# EAGLE board Phineas (EAGLE 9.6.2)
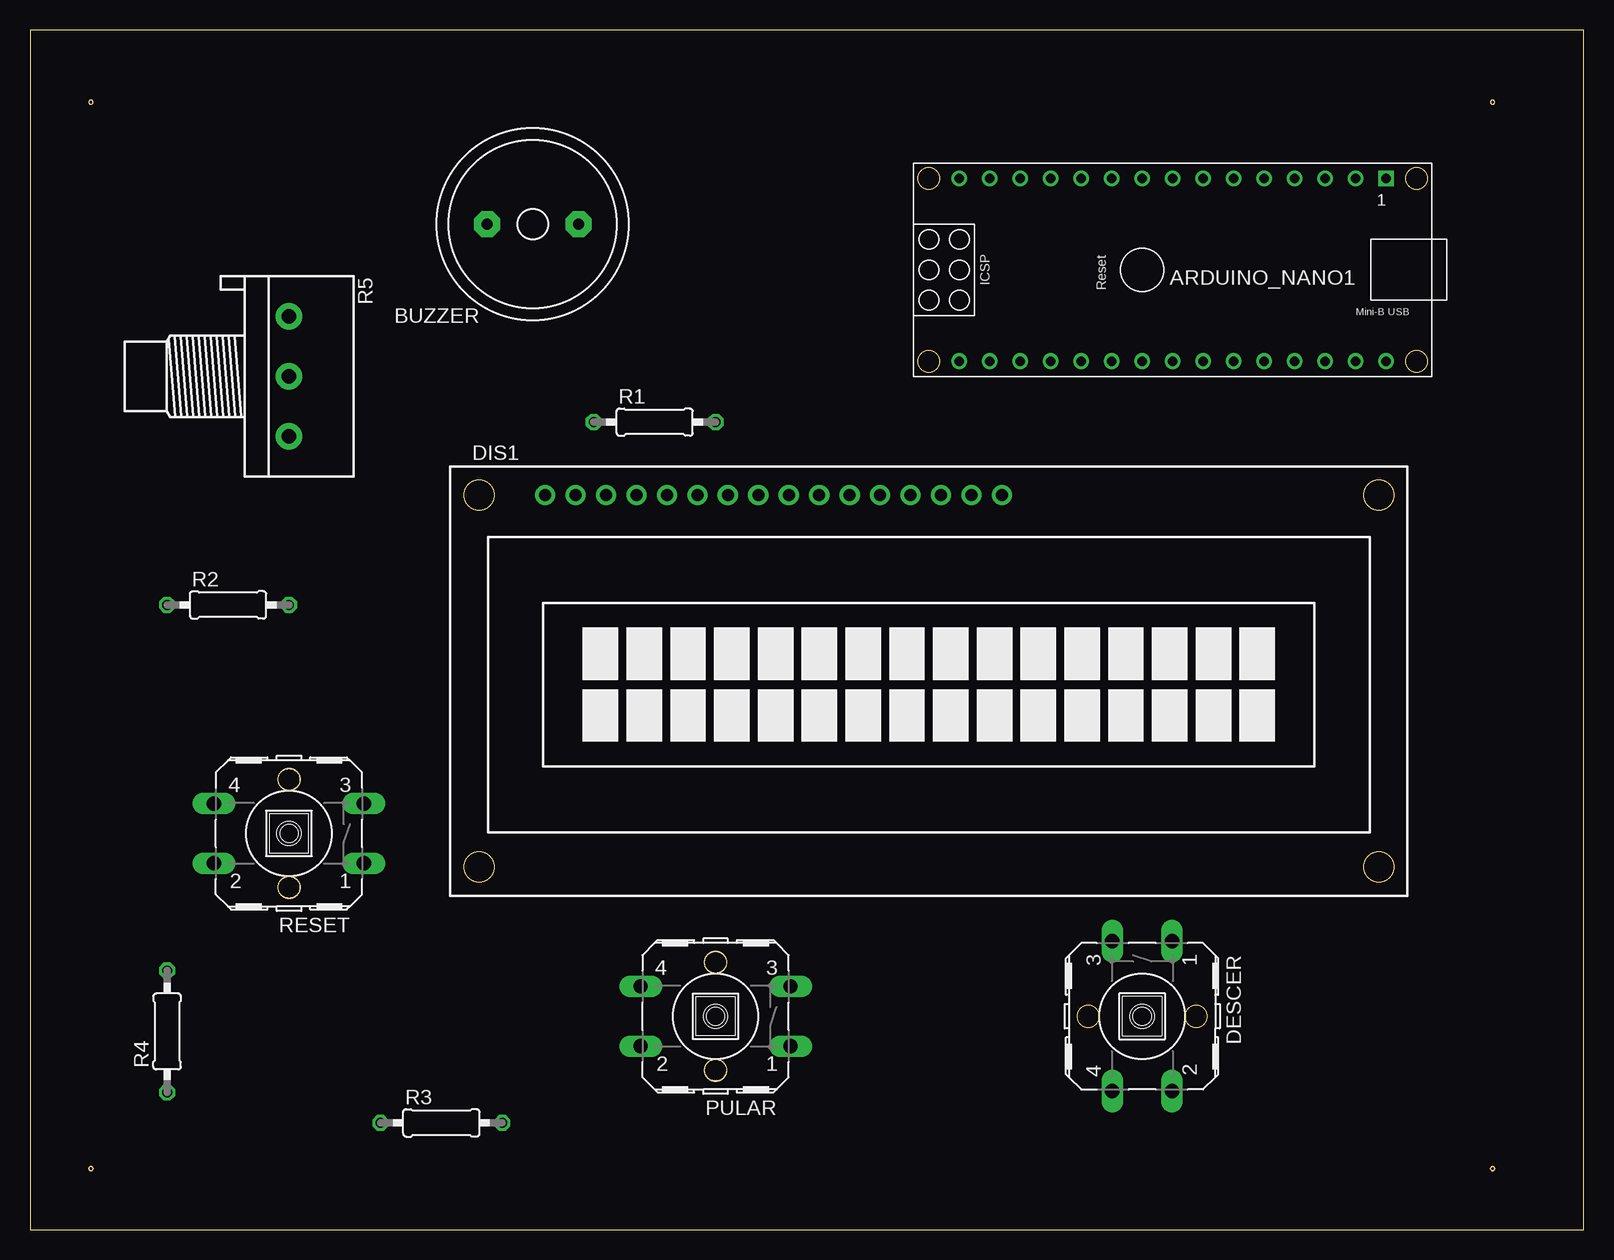
[diagram p0: board, top side]
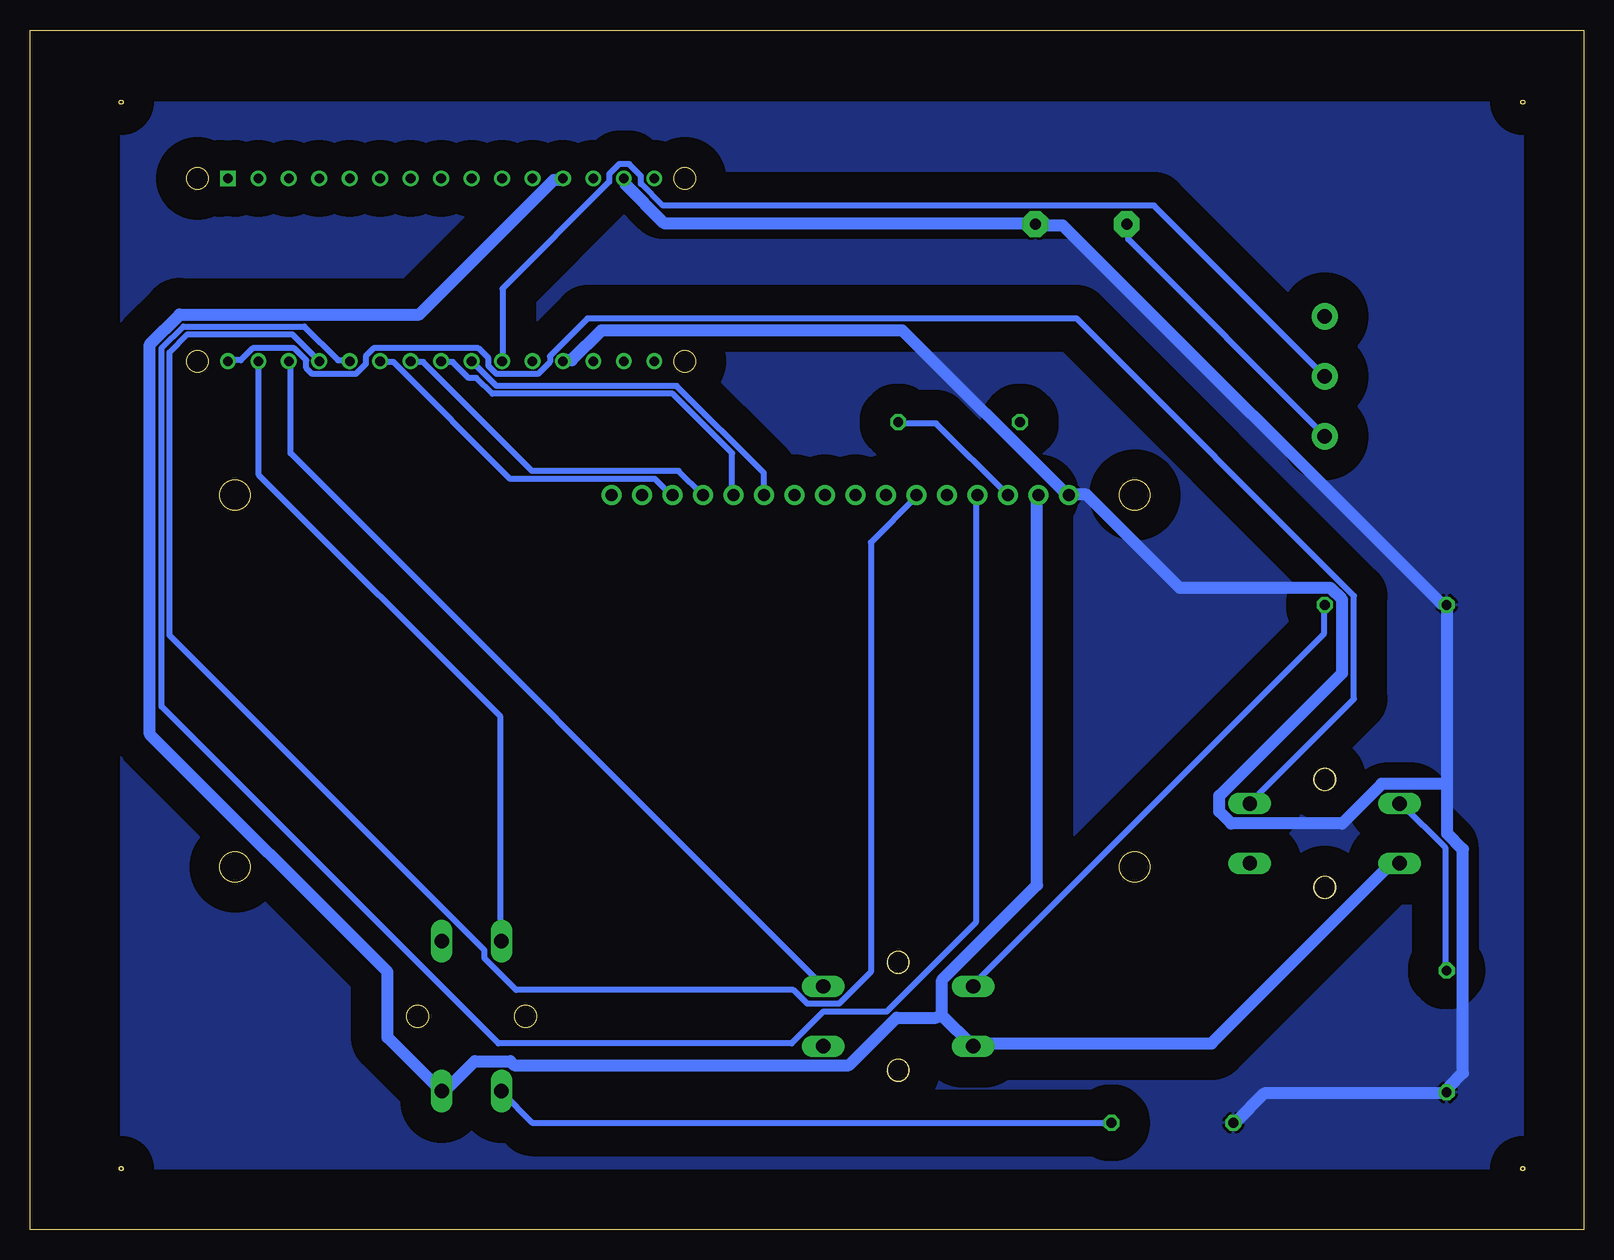
[diagram p1: board, bottom side, seen from below]

Size 129.52 x 100 mm. Coordinates in mm from the lower left corner, seen from the top.
Outline: 20.7,28.41 20.69,28.48 20.69,28.56 20.7,28.64 20.71,28.72 20.73,28.8 20.76,28.87 20.79,28.94 20.83,29.01 20.87,29.07 20.93,29.13 20.98,29.19 21.04,29.24 21.11,29.29 21.17,29.32 21.25,29.36 21.32,29.39 21.39,29.41 21.47,29.42 21.55,29.43 21.63,29.43 21.71,29.42 21.79,29.41 21.86,29.39 21.93,29.36 22.01,29.32 22.07,29.29 22.14,29.24 22.2,29.19 22.25,29.13 22.31,29.07 22.35,29.01 22.39,28.94 22.42,28.87 22.45,28.8 22.47,28.72 22.48,28.64 22.49,28.56 22.49,28.48 22.48,28.41 22.47,28.33 22.45,28.25 22.42,28.18 22.39,28.11 22.35,28.04 22.31,27.98 22.25,27.91 22.2,27.86 22.14,27.81 22.07,27.76 22.01,27.72 21.93,27.69 21.86,27.66 21.79,27.64 21.71,27.63 21.63,27.62 21.55,27.62 21.47,27.63 21.39,27.64 21.32,27.66 21.25,27.69 21.17,27.72 21.11,27.76 21.04,27.81 20.98,27.86 20.93,27.91 20.87,27.98 20.83,28.04 20.79,28.11 20.76,28.18 20.73,28.25 20.71,28.33 20.7,28.41
Outline: 20.7,37.4 20.69,37.48 20.69,37.55 20.7,37.63 20.71,37.71 20.73,37.79 20.76,37.86 20.79,37.93 20.83,38 20.87,38.06 20.93,38.13 20.98,38.18 21.04,38.23 21.11,38.28 21.17,38.32 21.25,38.35 21.32,38.38 21.39,38.4 21.47,38.41 21.55,38.42 21.63,38.42 21.71,38.41 21.79,38.4 21.86,38.38 21.93,38.35 22.01,38.32 22.07,38.28 22.14,38.23 22.2,38.18 22.25,38.13 22.31,38.06 22.35,38 22.39,37.93 22.42,37.86 22.45,37.79 22.47,37.71 22.48,37.63 22.49,37.55 22.49,37.48 22.48,37.4 22.47,37.32 22.45,37.24 22.42,37.17 22.39,37.1 22.35,37.03 22.31,36.97 22.25,36.91 22.2,36.85 22.14,36.8 22.07,36.76 22.01,36.72 21.93,36.68 21.86,36.66 21.79,36.63 21.71,36.62 21.63,36.61 21.55,36.61 21.47,36.62 21.39,36.63 21.32,36.66 21.25,36.68 21.17,36.72 21.11,36.76 21.04,36.8 20.98,36.85 20.93,36.91 20.87,36.97 20.83,37.03 20.79,37.1 20.76,37.17 20.73,37.24 20.71,37.32 20.7,37.4
Outline: 56.26,13.17 56.25,13.24 56.25,13.32 56.26,13.4 56.27,13.48 56.29,13.56 56.32,13.63 56.35,13.7 56.39,13.77 56.43,13.83 56.48,13.89 56.54,13.95 56.6,14 56.66,14.04 56.73,14.09 56.8,14.12 56.88,14.14 56.95,14.16 57.03,14.18 57.11,14.19 57.19,14.19 57.27,14.18 57.34,14.16 57.42,14.14 57.49,14.12 57.57,14.09 57.63,14.04 57.7,14 57.76,13.95 57.81,13.89 57.87,13.83 57.91,13.77 57.95,13.7 57.98,13.63 58.01,13.56 58.03,13.48 58.05,13.4 58.05,13.32 58.05,13.24 58.05,13.17 58.03,13.09 58.01,13.01 57.98,12.94 57.95,12.87 57.91,12.8 57.87,12.73 57.81,12.67 57.76,12.62 57.7,12.57 57.63,12.52 57.57,12.48 57.49,12.45 57.42,12.42 57.34,12.4 57.27,12.39 57.19,12.38 57.11,12.38 57.03,12.39 56.95,12.4 56.88,12.42 56.8,12.45 56.73,12.48 56.66,12.52 56.6,12.57 56.54,12.62 56.48,12.67 56.43,12.73 56.39,12.8 56.35,12.87 56.32,12.94 56.29,13.01 56.27,13.09 56.26,13.17
Outline: 56.26,22.16 56.25,22.24 56.25,22.32 56.26,22.39 56.27,22.47 56.29,22.55 56.32,22.62 56.35,22.69 56.39,22.76 56.43,22.82 56.48,22.89 56.54,22.94 56.6,22.99 56.66,23.04 56.73,23.08 56.8,23.11 56.88,23.14 56.95,23.16 57.03,23.17 57.11,23.18 57.19,23.18 57.27,23.17 57.34,23.16 57.42,23.14 57.49,23.11 57.57,23.08 57.63,23.04 57.7,22.99 57.76,22.94 57.81,22.89 57.87,22.82 57.91,22.76 57.95,22.69 57.98,22.62 58.01,22.55 58.03,22.47 58.05,22.39 58.05,22.32 58.05,22.24 58.05,22.16 58.03,22.08 58.01,22 57.98,21.93 57.95,21.86 57.91,21.79 57.87,21.73 57.81,21.67 57.76,21.61 57.7,21.56 57.63,21.52 57.57,21.48 57.49,21.44 57.42,21.41 57.34,21.39 57.27,21.38 57.19,21.37 57.11,21.37 57.03,21.38 56.95,21.39 56.88,21.41 56.8,21.44 56.73,21.48 56.66,21.52 56.6,21.56 56.54,21.61 56.48,21.67 56.43,21.73 56.39,21.79 56.35,21.86 56.32,21.93 56.29,22 56.27,22.08 56.26,22.16
Outline: 121.75,5.06 arc169 122.09,5.06 122.09,5.1 arc169 121.75,5.1 121.75,5.06
Outline: 121.75,93.96 arc169 122.09,93.96 122.09,94 arc169 121.75,94 121.75,93.96
Outline: 4.91,5.06 arc169 5.25,5.06 5.25,5.1 arc169 4.91,5.1 4.91,5.06
Outline: 4.91,93.96 arc169 5.25,93.96 5.25,94 arc169 4.91,94 4.91,93.96
Outline: 0,100 0,0 129.52,0 129.52,100 0,100
Outline: circle at 112.43,61.22 radius 1.25
Outline: circle at 37.43,61.22 radius 1.25
Outline: circle at 37.43,30.22 radius 1.25
Outline: circle at 112.43,30.22 radius 1.25
Outline: circle at 97.21,17.78 radius 0.9
Outline: circle at 88.21,17.78 radius 0.9
Outline: circle at 74.93,87.63 radius 0.89
Outline: circle at 74.93,72.39 radius 0.89
Outline: circle at 115.57,72.39 radius 0.89
Outline: circle at 115.57,87.63 radius 0.89
Copper layers (1*16): Top 0.035mm / dielectric 1.5mm / Bottom 0.035mm
Design rules "default": minimum track width 6mil, minimum drill 0.35mm, track to track 6mil, track to pad 6mil, pad to pad 6mil, via to via 6mil, smd to smd 6mil, copper to edge 40mil, drill to drill 6mil, minimum pad ring 10mil, minimum via ring 8mil, stop-mask expansion 4mil, vias tented up to drill 0mil, thermal gap 10mil
Net classes: 0 default: width 0.508 mm; 1 alimentacao: width 1.016 mm

## Footprints (pad centres in the part's own frame; a part is rotated, then mirrored left to right if it is on the bottom)
ARDUINO_NANO = drill 0.8 square: 1 -20.32,-7.62 | drill 0.8: 2 -17.78,-7.62; 3 -15.24,-7.62; 4 -12.7,-7.62; 5 -10.16,-7.62; 6 -7.62,-7.62; 7 -5.08,-7.62; 8 -2.54,-7.62; 9 0,-7.62; 10 2.54,-7.62; 11 5.08,-7.62; 12 7.62,-7.62; 13 10.16,-7.62; 14 12.7,-7.62; 15 15.24,-7.62; 16 15.24,7.62; 17 12.7,7.62; 18 10.16,7.62; 19 7.62,7.62; 20 5.08,7.62; 21 2.54,7.62; 22 0,7.62; 23 -2.54,7.62; 24 -5.08,7.62; 25 -7.62,7.62; 26 -10.16,7.62; 27 -12.7,7.62; 28 -15.24,7.62; 29 -17.78,7.62; 30 -20.32,7.62 | hole 1.778: -22.86,-7.62; -22.86,7.62; 17.78,7.62; 17.78,-7.62
F/QMB = drill 0.914 pad 2.159 octagon: + 3.81,0; - -3.81,0
B3F-40XX = drill 1.194 long: 1 -6.248,2.489; 2 6.248,2.489; 3 -6.248,-2.489; 4 6.248,-2.489 | hole 1.803: 0,-4.496; 0,4.496
TUXGR_16X2_R2 = drill 1 pad 1.676: 1 -32,15.5; 2 -29.46,15.5; 3 -26.92,15.5; 4 -24.38,15.5; 5 -21.84,15.5; 6 -19.3,15.5; 7 -16.76,15.5; 8 -14.22,15.5; 9 -11.68,15.5; 10 -9.14,15.5; 11 -6.6,15.5; 12 -4.06,15.5; 13 -1.52,15.5; 14 1.02,15.5; 15 3.56,15.5; 16 6.1,15.5 | hole 2.5: -37.5,-15.5; 37.5,-15.5; -37.5,15.5; 37.5,15.5
0207/10 = drill 0.813 octagon: 1 -5.08,0; 2 5.08,0
3RP/1610N = drill 1.2 pad 2.184: 1 -5,0; 2 0,0; 3 5,0

## Placement (x,y rotation side)
ARDUINO_NANO1  [ARDUINO_NANO]  92.71,80.01 180 top
BUZZER  F/QMB  [F/QMB]  41.91,83.82 180 top
DESCER  [B3F-40XX]  92.71,17.78 270 top
DIS1  TUXGR_16X2_R2  [TUXGR_16X2_R2]  74.93,45.72 0 top
PULAR  [B3F-40XX]  57.15,17.78 180 top
R1  [0207/10]  52.07,67.31 0 top
R2  [0207/10]  16.51,52.07 0 top
R3  [0207/10]  34.29,8.89 0 top
R4  [0207/10]  11.43,16.51 90 top
R5  [3RP/1610N]  21.59,71.12 270 top
RESET  [B3F-40XX]  21.59,33.02 180 top

## Library data of the parts
ARDUINO_NANO1 = ArduinoNanoV30
BUZZER = buzzer; OC_FARNELL: unknown; OC_NEWARK: unknown
DESCER RESET = switch-omron; MF: OMRON COMPONENTS USA; MPN: B3F-4000; OC_FARNELL: 176434; OC_NEWARK: 36K3105
DIS1 = display-lcd; OC_FARNELL: unknown; OC_NEWARK: unknown
PULAR = switch-omron; MF: OMRON COMPONENTS USA; MPN: B3F-4000; OC_FARNELL: 176434; OC_NEWARK: 36K3105; SPICEPREFIX: E
R1-R4 = rcl; SPICEPREFIX: R
R5 = pot

## Nets
GND [alimentacao]: ARDUINO_NANO1.14 ARDUINO_NANO1.19 BUZZER.- DIS1.1 R2.1 R3.1 R4.1
N$2: DIS1.3 R1.2
N$3: PULAR.4 R2.2
N$4: DESCER.4 R3.2
N$5: ARDUINO_NANO1.26 DIS1.4
N$6: ARDUINO_NANO1.30 RESET.3
N$7: ARDUINO_NANO1.29 DESCER.3
N$8: ARDUINO_NANO1.28 PULAR.3
N$9: ARDUINO_NANO1.27 DIS1.6
N$10: BUZZER.+ R5.3
N$11: ARDUINO_NANO1.25 DIS1.14
N$12: ARDUINO_NANO1.24 DIS1.13
N$13: ARDUINO_NANO1.23 DIS1.12
N$14: ARDUINO_NANO1.22 DIS1.11
N$15: R4.2 RESET.4
N$18: ARDUINO_NANO1.21 R5.2
VCC [alimentacao]: ARDUINO_NANO1.12 DESCER.2 DIS1.2 PULAR.2 RESET.2
VIN [alimentacao]: ARDUINO_NANO1.15

## Tracks (layer width: path | path; a pad name or v marks a point on that pad's centre or on a via)
GND
  Bottom 1.016: ARDUINO_NANO1.19 85.03,72.48 84.37,72.48 81.89,74.95 56.79,74.95 43.09,61.25 DIS1.1 42.43,61.25 41.44,61.25 33.68,53.49 21.13,53.49 20.14,52.5 20.14,46.39 30.38,36.16 30.38,34.84 29.39,33.85 20.14,33.85 16.84,37.15 11.39,37.15 | ARDUINO_NANO1.14 79.91,87.5 79.91,87.17 76.61,83.87 45.73,83.87 BUZZER.- 45.24,83.71 43.42,83.71 11.89,52.17 R2.1 11.39,52.01 11.39,37.15 | R3.1 29.06,8.91 26.58,11.39 11.56,11.39 R4.1 11.23,11.89 10.07,13.04 10.07,31.7 11.39,33.02 11.39,37.15
  pour Bottom (isolate 2.54): 5.08,93.98 5.08,5.08 121.92,5.08 121.92,93.98
N$2
  Bottom 0.508: R1.2 57.12,67.2 53.99,67.2 48.04,61.25 DIS1.3
N$3
  Bottom 0.508: R2.2 21.63,52.01 21.63,49.7 51.02,20.31 PULAR.4
N$4
  Bottom 0.508: R3.2 39.46,8.91 87.67,8.91 90.14,11.39 DESCER.4
N$5
  Bottom 0.508: ARDUINO_NANO1.26 103.02,72.48 103.85,72.48 106.66,75.29 116.73,75.29 118.54,73.47 118.54,43.59 90.47,15.52 66.04,15.52 63.4,18.16 58.12,18.16 50.69,25.59 50.69,61.09 DIS1.4
N$6
  Bottom 0.508: ARDUINO_NANO1.30 112.93,72.48 111.94,72.48 110.95,73.47 107.48,73.47 106.49,72.48 106.49,71.82 105.99,71.32 102.36,71.32 101.54,72.15 101.54,72.81 100.88,73.47 92.13,73.47 91.3,72.64 91.3,71.98 90.64,71.32 87.17,71.32 86.18,72.31 86.18,72.81 83.05,75.95 42.27,75.95 19.15,52.83 19.15,44.25 27.74,35.66 RESET.3
N$7
  Bottom 0.508: ARDUINO_NANO1.29 110.45,72.31 110.45,62.9 90.31,42.76 90.31,24.11 DESCER.3
N$8
  Bottom 0.508: ARDUINO_NANO1.28 107.81,72.31 107.81,64.72 63.4,20.31 PULAR.3
N$9
  Bottom 0.508: ARDUINO_NANO1.27 107.64,74.62 116.39,74.62 117.88,73.14 117.88,49.53 91.63,23.28 91.63,22.62 88.99,19.98 65.88,19.98 64.72,18.82 62.08,18.82 59.44,21.46 59.44,57.29 55.64,61.09 DIS1.6
N$10
  Bottom 0.508: BUZZER.+ 37.97,83.71 37.97,82.55 21.63,66.2 R5.3
N$11
  Bottom 0.508: ARDUINO_NANO1.25 100.22,72.31 99.22,72.31 89.48,62.57 77.43,62.57 76.11,61.25 DIS1.14
N$12
  Bottom 0.508: ARDUINO_NANO1.24 97.74,72.31 96.75,72.31 87.67,63.23 75.45,63.23 73.47,61.25 DIS1.13
N$13
  Bottom 0.508: ARDUINO_NANO1.23 95.1,72.31 94.27,72.31 92.95,70.99 92.29,70.99 90.97,69.67 75.95,69.67 70.99,64.72 70.99,61.25 DIS1.12
N$14
  Bottom 0.508: ARDUINO_NANO1.22 92.62,72.31 90.64,70.33 75.62,70.33 68.35,63.07 68.35,61.25 DIS1.11
N$15
  Bottom 0.508: R4.2 11.56,21.63 11.56,31.86 15.19,35.5 RESET.4
N$18
  Bottom 0.508: R5.2 35.83,85.36 76.77,85.36 78.59,87.17 78.59,87.83 79.58,88.82 80.4,88.82 81.23,88 81.23,87.34 90.14,78.42 90.14,72.48 ARDUINO_NANO1.21
VCC
  Bottom 1.016: 53.49,17.83 53.49,20.8 45.57,28.73 45.57,61.09 DIS1.2 | 53.49,17.83 51.02,15.35 PULAR.2 50.52,15.52 31.04,15.52 16.18,30.38 15.35,30.38 RESET.2 | ARDUINO_NANO1.12 85.19,87.5 85.85,87.5 97.08,76.28 117.06,76.28 119.53,73.8 119.53,41.27 99.72,21.46 99.72,16.02 95.26,11.56 DESCER.2 94.77,11.72 92.46,14.03 89.48,14.03 89.15,13.7 61.25,13.7 57.29,17.67 53.99,17.67 53.49,17.83